# Altium PCB Sensor_Box_PWR_Backup.PCBDOC (part 2 of 2)
Units mil, origin at the board's own origin, x right, y up, seen from the top; angles counter-clockwise.
Board outline 1781.68 x 2876.17 mil, 2 copper layers (Top, Bot), stack 61.855 mil thick; 91 components, 72 nets, 274 pads, 117 vias.
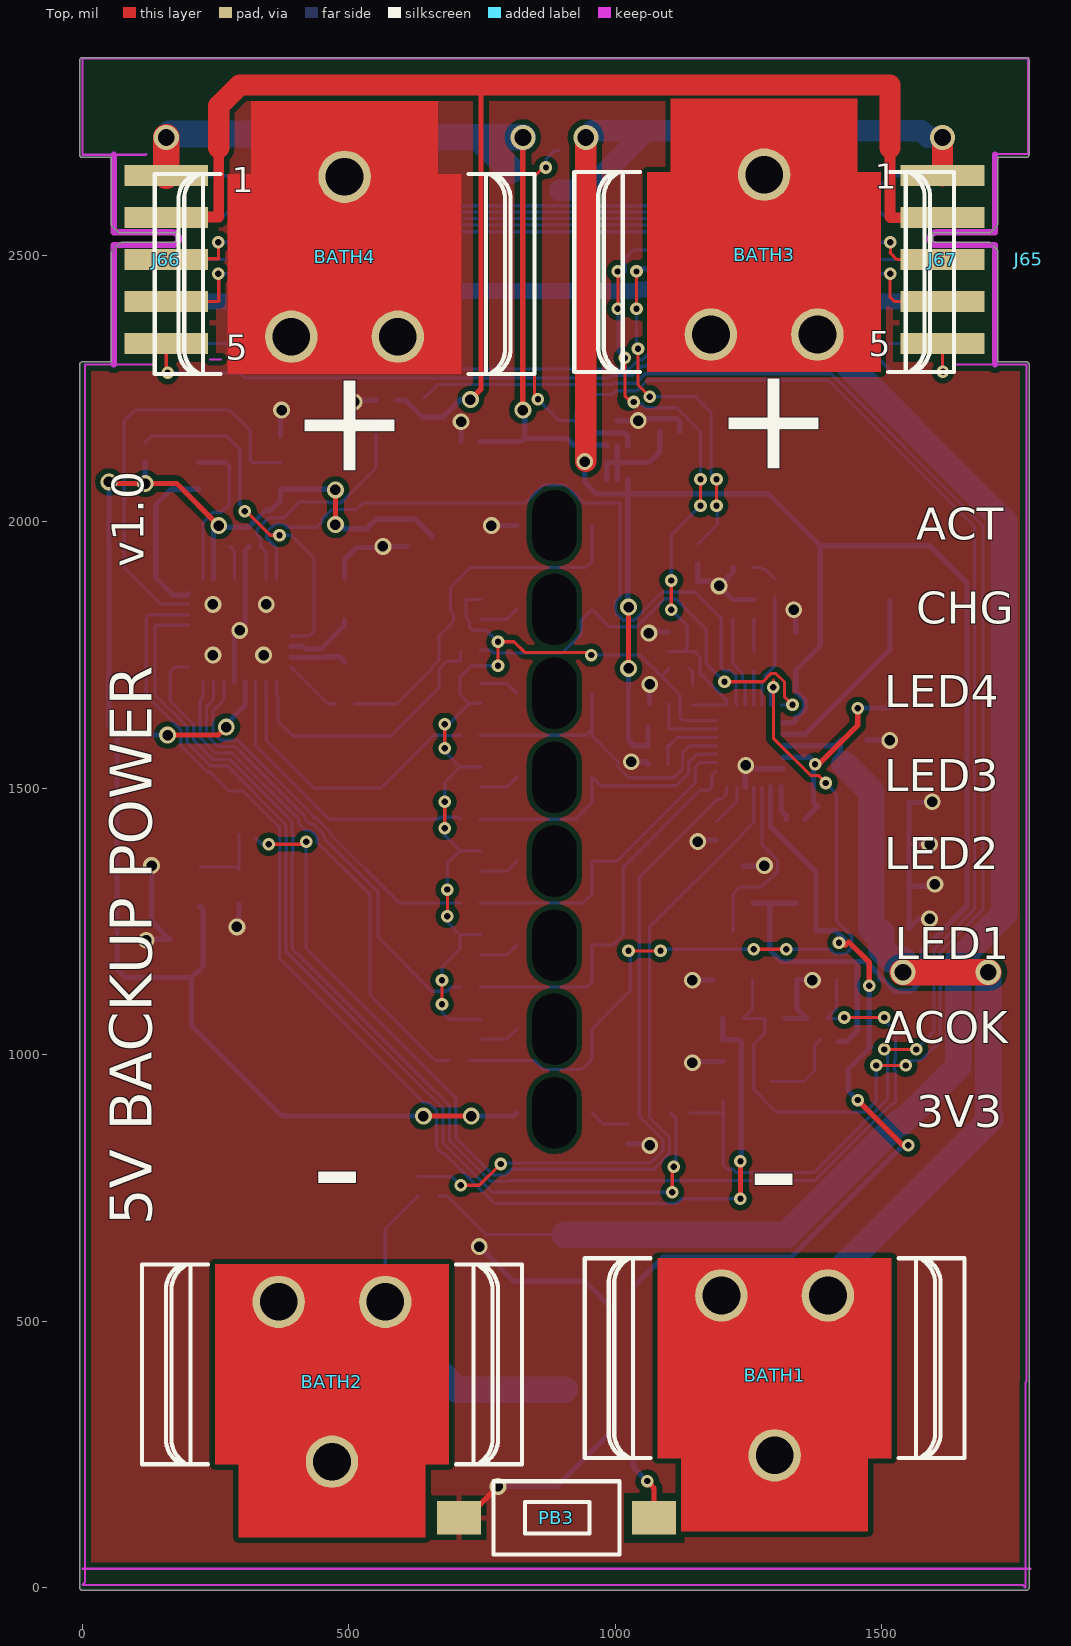
[diagram p0: Top view]

## Via types
v1: diameter 23.62, hole 11.81, Top to Bot, tented both sides, 64 vias
v2: diameter 31.5, hole 19.68, Top to Bot, tented both sides, 47 vias
v3: diameter 47.24, hole 31.5, Top to Bot, tented both sides, 6 vias

## Nets (pads, with @x,y where several pads share a name; then routed paths per layer and width w, separated by ;. In a path a pad name is that pad's centre, name@x,y a point inside that pad or via, vN(x,y) a via of type N, cw(c..) or ccw(c..) an arc to the next point about the centre after c; other vN are vias at no path point) (continued)
NetJ66_4: J66.4 J67.4 | length 1625.8
  Top w6: J66.4 255.91,2413.38 255.91,2465.05 v1(255.31,2465.64) ; v1(1516.34,2465.64) 1515.75,2465.05 1515.75,2421.68 1524.05,2413.38 J67.4
  Bot w6: v1(255.31,2465.64) 275.59,2465.64 354.33,2544.38 445.07,2544.38 448.13,2541.32 536.12,2541.32 539.18,2544.38 1397.64,2544.38 1476.38,2465.64 v1(1516.34,2465.64)
NetJ66_5: J66.5 J67.5 | length 1714.2
  Top w6: J66.5 157.48,2282.53 v1(160,2280.01) ; J67.5 1614.17,2282.3 v1(1615,2281.47)
  Bot w6: v1(160,2280.01) 295,2280.01 305,2270.01 988.23,2270.01 993.04,2274.83 1004.61,2274.83 1031.79,2274.83 1049.17,2292.2 1056.31,2292.2 1075.53,2311.42 1075.53,2350.54 1135,2410.01 1410,2410.01 1445,2375.01 1445,2355.01 1518.54,2281.47 v1(1615,2281.47)
NetJ66_6: J66.6 J67.6 | length 1506.6
  Bot w6: J66.6 279.85,2649.6 336.2,2593.26 464.08,2593.26 468.01,2589.32 516.24,2589.32 520.18,2593.26 1459.4,2593.26 1515.75,2649.6 J67.6
NetJ66_7: J66.7 J67.7 | length 1477
  Bot w6: J66.7 262.7,2570.86 283.28,2591.44 321.05,2591.44 331.23,2581.26 459.11,2581.26 463.04,2577.32 521.21,2577.32 525.15,2581.26 1498.56,2581.26 1508.95,2570.86 J67.7
NetJ66_8: J66.8 J67.8 | length 1513.2
  Bot w6: J66.8 279.92,2492.12 344.18,2556.38 450.04,2556.38 453.1,2553.32 531.15,2553.32 535.09,2557.26 1424.13,2557.26 1489.27,2492.12 J67.8
NetJ66_10: J66.10 J67.10 | length 1594.5
  Bot w6: J66.10 268.8,2334.64 316.61,2286.83 1009.58,2286.83 1026.82,2286.83 1044.2,2304.2 1051.34,2304.2 1063.53,2316.39 1063.53,2355.51 1130.03,2422.01 1414.97,2422.01 1457,2379.98 1457,2374.98 1497.34,2334.64 J67.10
NetLD14_2: LD14.2 R196.2 | length 74.6
  Bot w6: R196.2 796.46,1187.3 LD14.2
NetLD15_2: LD15.2 R201.2 | length 74.6
  Bot w6: R201.2 796.46,1344.78 LD15.2
NetLD16_2: LD16.2 R203.2 | length 74.6
  Bot w6: R203.2 796.46,1502.26 LD16.2
NetLD17_2: LD17.2 R207.2 | length 74.6
  Bot w6: R207.2 796.46,1696.75 LD17.2
NetLD18_2: LD18.2 R210.2 | length 74.6
  Bot w6: R210.2 796.46,1817.22 LD18.2
NetLD19_2: LD19.2 R213.2 | length 74.6
  Bot w6: R213.2 796.46,1029.82 LD19.2
NetLD20_1: LD20.1 R5.2 | length 75.6
  Bot w6: LD20.1 977.56,869.97 R5.2
NetLD24_2: LD24.2 R269.2 | length 698
  Bot w6: R269.2 590.55,1658.56 657.19,1725.2 657.19,1728.6 669.29,1740.71 669.29,1786.41 696.66,1813.78 696.66,1826.38 690.76,1832.28 690.76,1876.88 728.35,1914.46 944.88,1914.46 956.69,1926.27 LD24.2
NetR83_1: R83.1 RT1.1 | length 956.8
  Top w6: v1(1040,2400.01) v1(1040,2470.01) ; v1(1042.72,2325.01) 1042.72,2257.3 v1(1065,2235.01) ; v1(1190,2030.01) v1(1190,2080.01)
  Bot w6: v1(1040,2400.01) 1040,2332.3 1045,2327.3 v1(1042.72,2325.01) ; v1(1065,2235.01) 1150,2235.01 1180,2205.01 1180,2090.01 v1(1190,2080.01) ; R83.1 1191.5,1995.01 1191.5,2028.52 v1(1190,2030.01)
  Bot w10: v1(1040,2470.01) 1035,2475.01 1243.77,2475.01 1244.46,2474.33 1290.97,2474.33 1321.66,2505.01 RT1.1
NetR187_2: R187.2 T11.2 T11.5 T11.6 | length 239.7
  Bot w10: T11.6 984.25,2111.31 1003.94,2111.31 ; T11.5 1003.94,2111.31 ; T11.2 1003.94,2111.31 ; R187.2 1083.86,2132.18 1062.99,2111.31 1003.94,2111.31
NetR195_1: R195.1 R387.1 | length 34.2
  Bot w6: R387.1 1145,1718.5 R195.1@1145,1693.5
NetR197_2: R197.2 R198.1 | length 49.2
  Bot w6: R198.1 1272.56,1914.46 1276.1,1910.92 1281.89,1910.92 R197.2
NetR199_2: R199.2 R200.1 | length 61.4
  Bot w6: R199.2 R200.1
P3V3: C173.1 C174.2 IC57.2 IC65.4 IC65.18 J90.2 LD20.2 R258.1 TP17.1 | length 3213.2
  Top w10: v2(50,2075.01) 53.07,2071.94 v2(118.11,2071.94) 177.17,2071.94 v2(255.91,1993.2) ; v2(160,1600.01) 255,1600.01 v2(270,1615.01) ; v2(475,1995.01) v2(475,2060.01) ; v2(640,885.01) v2(730,885.01)
  Bot w10: v2(50,2075.01) 50,1615.01 65,1600.01 ; v2(118.11,2071.94) R258.1 ; v2(160,1600.01) 65,1600.01 ; IC57.2 226.97,1271.7 226.97,1166.99 205,1145.01 ; IC65.18 246.06,1983.36 v2(255.91,1993.2) 259.03,1990.08 312.48,1990.08 344.23,2021.83 353.41,2021.83 372.05,2040.46 J90.2 473.7,2061.31 v2(475,2060.01) ; v2(270,1615.01) 270,1620.01 305.12,1655.13 IC65.4 ; v2(475,1995.01) 485,1995.01 492.7,1987.32 C174.2 533.48,1987.32 551.18,2005.01 624.02,2005.01 TP17.1@656.67,1972.36 ; v2(640,885.01) 375,885.01 205,1055.01 205,1145.01 ; v2(730,885.01) 809.13,885.01 LD20.2 ; 65,1600.01 65,1160.01 80,1145.01 205,1145.01
P5V0i: C162.1 J66.1 T10.3 T11.1 | length 1646.2
  Top w10: v2(826.77,2209.74) v3(826.77,2721.55)
  Top w50: J66.1 v3(157.48,2721.55)
  Bot w10: C162.1 824.09,2150.68 830,2156.59 ; v2(826.77,2209.74) 830,2206.51 830,2156.59 ; T11.1 982.39,2144.28 921.76,2144.28 909.45,2156.59 830,2156.59
  Bot w50: v3(157.48,2721.55) 163.68,2727.75 525.35,2727.75 531.55,2721.55 743.19,2721.55 ; T10.3 743.19,2721.55 ; v3(826.77,2721.55) 743.19,2721.55
P5V0o: C163.1 IC56.1 J67.1 R186.2 R190.2 R204.2 R205.2 R300.2 T10.2 T11.4 | length 4803.5
  Top w10: v2(1025,1725.01) v2(1025,1840.01)
  Top w40: v2@944.88,2113.28 v3(944.88,2721.55) ; J67.1 v3(1614.17,2721.55)
  Bot w10: v2(942.91,2113.28) 942.91,2073.91 964.57,2052.26 1023.62,2052.26 ; T11.4 1023.62,2052.26 ; v2(1025,1725.01) 1025,1590.01 1035,1580.01 R186.2 R190.2 ; v2@1025,1850.01 1023.62,1851.39 1023.62,2052.26 ; R204.2 1290,1284.54 ; IC56.1 1334.65,1623.12 1338.58,1627.06 1338.58,1633.78 1342.13,1633.78 1355.49,1647.14 1355.49,1666.04 1338.58,1682.94 C163.1 1385,1767.97 1385,1955.01 ; R205.2 1290,1284.54 ; R300.2 1435,1025.01 1454,1044.01 1454,1175.12 ; 1023.62,2052.26 1024.19,2052.83 1287.19,2052.83 1385,1955.01 ; 1290,1284.54 1290,1196.53 1311.42,1175.12 1454,1175.12 ; 1385,1955.01 1590,1955.01 1660,1885.01 1660,1279.06 1576,1195.06 1576,1140.1 1554.91,1119.01 1525.09,1119.01 1501.36,1142.74 1496,1142.74 1496,1149.5 1470.38,1175.12 1454,1175.12
  Bot w40: T10.2 947.6,2622.61 1058.83,2733.84 ; v3(944.88,2721.55) 957.17,2733.84 1058.83,2733.84 ; v3(1614.17,2721.55) 1587.09,2721.55 1574.8,2733.84 1336.39,2733.84 1058.83,2733.84
P12V0: J66.2 J67.2 R208.2 R214.2 | length 2693.7
  Top w10: v2(728.35,2229.42) 748.03,2249.11 748.03,2819.98
  Top w20: J66.2 158.7,2572.09 255.91,2572.09 255.91,2701.86 ; 1515.75,2701.86 1515.75,2572.08 1516.97,2570.86 J67.2
  Top w40: 255.91,2701.86 255.91,2780.6 295.28,2819.98 748.03,2819.98 1515.75,2819.98 1515.75,2701.86
  Bot w10: R208.2 606.1,2228.24 637.83,2196.51 R214.2 676.5,2196.51 709.41,2229.42 v2(728.35,2229.42)
P\B\: IC65.9 R212.2 T12.1 | length 2464.2
  Top w6: v1(1430,1070.01) v1(1505,1070.01)
  Bot w6: IC65.9 173.7,1727.46 165,1718.75 165,1663.95 209.25,1619.7 209.25,1589.85 244.84,1554.27 276.72,1554.27 394,1436.98 394,1414.39 394.81,1413.58 394.81,1376.45 394,1375.64 394,1199.04 659.28,933.76 660.19,933.76 688.75,905.21 688.75,839.64 766.18,762.2 798.59,762.2 800.59,764.2 1375.19,764.2 1517.82,906.83 1521.81,906.83 1525.81,910.83 1525.81,969.77 1524.19,971.39 1524.19,988.63 1525.81,990.26 1525.81,1044.2 1505,1065.01 v1(1505,1070.01) v1@1500,1070.01 ; T12.1 1415.35,1086.9 R212.2 1437.99,1068.01 1435.98,1070.01 v1(1430,1070.01)
PROG_MISO: IC65.16 J90.1 | length 306.4
  Bot w10: IC65.16 198.82,1864.44 196.85,1862.47 170.1,1862.47 137.8,1894.78 137.8,2032.57 166.54,2061.31 J90.1
PROG_MOSI: IC65.15 J90.4 | length 798.7
  Bot w6: IC65.15 147.64,1845.57 78.74,1914.46 78.74,2190.05 98.43,2209.74 276.85,2209.74 314.96,2171.63 314.96,2116.63 320.27,2111.31 J90.4
PROG_SCK: IC65.17 J90.3 | length 301.8
  Bot w6: IC65.17 226.38,1998.67 245.65,2017.95 260.97,2017.95 275.59,2032.57 275.59,2106 270.28,2111.31
  Bot w10: J90.3 270.28,2111.31
PWRSTAT: R188.2 R307.2 T10.1 T11.3 T18.1 | length 3373.5
  Top w6: v1(855,2230.01) 848.46,2236.56 848.46,2648.47 865,2665.01 v1(870,2665.01) ; v1(1505,1010.01) v1(1565,1010.01)
  Bot w6: v1(855,2230.01) 894.96,2190.05 R188.2@928.5,2190.05 ; v1(870,2665.01) 870,2680.01 887.4,2697.42 T10.1 ; R188.2 928.5,2238.5 929.26,2239.26 994.25,2239.26 1001,2246.01 1041.34,2246.01 1053.13,2257.8 1061.15,2265.83 1400.12,2265.83 1674,1991.94 1674,1273.26 1598,1197.26 1598,1043.01 v1(1565,1010.01) ; R307.2 1198.82,890.84 1202.76,894.78 ; T18.1 1202.76,894.78 ; v1(1505,1010.01) 1510.81,1004.2 1510.81,916.79 1373.22,779.2 1226.38,779.2 1220.57,785.01 1210,785.01 1202.76,792.26 1202.76,894.78
  Bot w10: R188.2 928.5,2190.05 928.5,2181.5 943.15,2166.85 1017.3,2166.85 1023.62,2160.53 T11.3
RESETn: IC65.29 J90.5 R258.2 | length 667.1
  Top w6: v1(305,2020.01) 307.83,2020.01 352.83,1975.01 v1(370,1975.01)
  Bot w6: R258.2 129.92,2161.31 J90.5 270.27,2161.31 295.28,2136.31 295.28,2032.57 307.83,2020.01 v1(305,2020.01) ; v1(370,1975.01) 392.2,1975.01 435,1932.22 435,1795 426.51,1786.51 IC65.29
Rx: IC65.30 TP20.1 | length 130.9
  Bot w10: IC65.30 413.36,1766.83 418.65,1761.54 447.49,1761.54 492.13,1806.18 TP20.1
Tx: IC65.31 TP19.1 | length 105.8
  Bot w10: IC65.31 393.33,1745.54 454.12,1745.54 455.72,1747.14 482.28,1747.14 TP19.1
VH: BATH1.1 C165.1 C166.1 C167.1 C168.1 C169.1 IC56.3 | length 1494
  Top w50: v3(1540,1155.01) v3(1700,1155.01)
  Bot w10: IC56.3 1412.09,1579.82 C169.1 1422.28,1557.98 1421.8,1557.49
  Bot w50: BATH1.1@1399.21,548.32 1399.21,574.23 1705,880.01 1700,885.01 v3(1700,1155.01) ; 1430,1545 1480.31,1494.69 C168.1 C167.1 C166.1 C165.1 1488.79,1228.83 1499.51,1228.83 1499.51,1196.9 1517.67,1178.74 1538.87,1178.74 1540,1177.61 v3(1540,1155.01)
pads on no net: IC65.10 IC65.11 IC65.12 IC65.19 IC65.22 IC65.25 IC65.26 IC65.27 IC65.28 L11.3 L11.4 LD14.3 LD15.3 LD16.3 LD17.3 LD18.3 LD19.3 LD20.3 LD24.3

## Polygon pours and split planes (outlines as drawn)
GND on Top "Signal Layer 1-No Net 1" (solid, remove dead copper, pour order 0): -5,2870.01 1766.65,2870.01 1771.65,2865.01 1771.65,0.02 1771.65,0.01 10,0.01 2.5,7.51
GND on Bot "Signal Layer 1-No Net 1" (solid, remove dead copper, pour order 2): -5,110.01 1760.06,110.01 1765,105.08 1765,2870.01 8.87,2870.01 5,2866.14

## Keep-outs
Top:
  lines w3.94: 0,35.43 1326.77,35.43 ; 452.76,35.43 1779.53,35.43
Bot:
  lines w3.94: 0,104.33 1312.99,104.33 ; 0,2761.81 1324.8,2761.81 ; 452.76,104.33 1765.75,104.33 ; 452.76,2761.81 1777.56,2761.81
KeepOutLayer:
  lines w3.94: 120,2690.01 118.96,2688.98 59.05,2688.98 0,2688.98 0,2870.01 1775,2870.01 1775,2690.01 1713.64,2690.01 1712.6,2688.97 ; 135,2295.01 134.74,2295.27 59.05,2295.27 5,2295.27 5,10.01 0,5.01 1764.98,5.01 1770,0 1770,385.01 1771.65,386.67 1771.65,2295.01 1771.39,2295.27 1712.6,2295.27 1636.12,2295.27 1635.86,2295.01 ; 225,2365.01 226.7,2366.71 226.7,2385.01 ; 240,2305.01 260,2305.01 ; 1545,2370.01 1545,2385.01

## Silkscreen, mask and mechanical layers (free items; w line width, h text height)
TopOverlay:
  text "+" at 1381.89,2071.94 h196.85 r90
  text "+" at 586.61,2068.01 h196.85 r90
  text "ACT" at 1564.55,1966.71 h60
  text "v1.0" at 115,1915.01 h60 r90
  text "CHG" at 1564.55,1809.23 h60
  text "LED4" at 1504.57,1651.75 h60
  text "LED3" at 1504.57,1494.27 h60
  text "LED2" at 1504.57,1348.6 h60
  text "LED1" at 1524.56,1179.31 h60
  text "ACOK" at 1504.57,1021.83 h60
  text "3V3" at 1564.55,864.35 h60
  text "-" at 527.56,843.6 h196.85 r180
  text "-" at 1346.46,839.66 h196.85 r180
  text "5V BACKUP POWER" at 130,680.01 h78.74 r90
Mechanical1:
  lines w10: 885.83,0 1771.65,0 ; 0,2295.27 59.05,2295.27 ; 0,2295.27 59.05,2295.27 ; 0,2295.27 0,0 1771.65,0 ; 59.05,2295.27 59.05,2503.94 74.8,2519.68 181.1,2519.68 181.1,2543.31 74.8,2543.31 59.05,2559.05 59.05,2688.98 0,2688.98 0,2866.14 1771.65,2866.14 1771.65,2688.97 1712.6,2688.97 1712.6,2559.05 1696.85,2543.3 1590.55,2543.3 1590.55,2519.68 1700.79,2519.68 1708.66,2511.81 1712.6,2507.87 1712.6,2295.27 1771.65,2295.27 ; 1771.65,0 1771.65,2295.27 ; 1771.65,2295.27 1771.65,2295.27

## Text inside footprints (layer, text, board x,y; h text height)
J66: TopOverlay "5" at 268.7,2303.94 h47.24; TopOverlay "1" at 280.51,2618.11 h47.24; BottomOverlay "10" at 273.62,2351.18 h47.24 r180; BottomOverlay "6" at 285.43,2665.35 h47.24 r180
J67: TopOverlay "1" at 1487.2,2625.19 h47.24; TopOverlay "5" at 1475.39,2311.02 h47.24; BottomOverlay "6" at 1482.28,2672.44 h47.24 r180; BottomOverlay "10" at 1440.94,2358.26 h47.24 r180